# EAGLE board 1untitled (EAGLE 5.08)
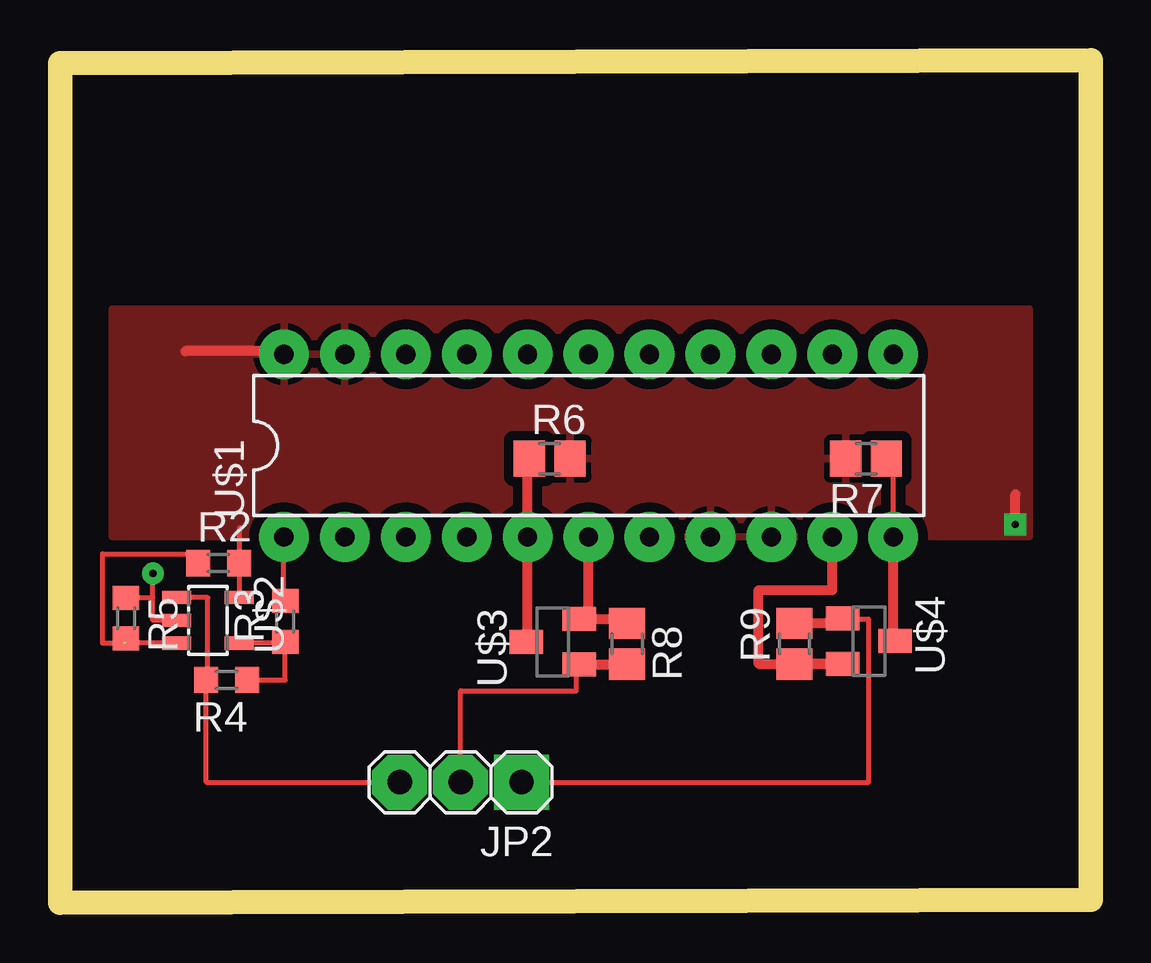
[diagram p0: board, top side]
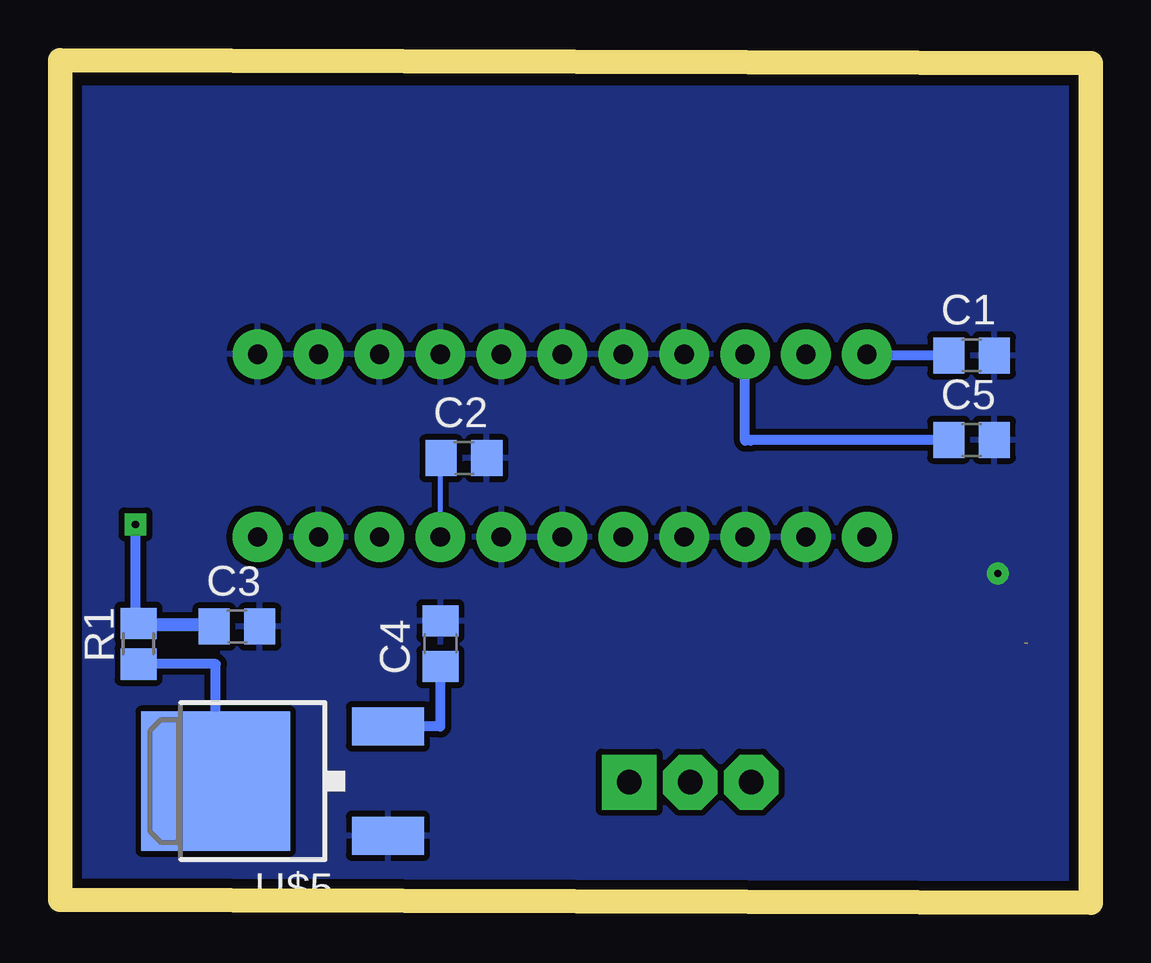
[diagram p1: board, bottom side, seen from below]

Size 42.97 x 35.13 mm. Coordinates in mm from the lower left corner, seen from the top.
Outline: 0,0 42.97,0.13 42.97,35.13 0,35 0,0
Copper layers (1*16): Top 0.015mm / dielectric 1.5mm / Bottom 0.015mm
Design rules "default *": minimum track width 0.2mm, minimum drill 0.3mm, track to track 0.25mm, track to pad 0.25mm, pad to pad 0.25mm, via to via 0.25mm, smd to smd 0.25mm, copper to edge 0.4mm, drill to drill 0.4mm, minimum pad ring 25mil, minimum via ring 12mil, stop-mask expansion 4mil, vias tented up to drill 0mil, thermal gap 10mil
bRestrict: area 45.5,10.6 to 50.9,22.5

## Footprints (pad centres in the part's own frame; a part is rotated, then mirrored left to right if it is on the bottom)
C0805 = smd 1.3 x 1.5: 1 -0.95,0; 2 0.95,0
1X03-S = drill 1.016 square: 1 -2.54,0 | drill 1.016 octagon: 2 0,0; 3 2.54,0
R0805 = smd 1.3 x 1.5: 1 -0.85,0; 2 0.85,0
R0603 = smd 1 x 1.1: 1 -0.85,0; 2 0.85,0
DIL22 = drill 0.8 round: P$1 0,0; P$2 2.54,0; P$3 5.08,0; P$4 7.62,0; P$5 10.16,0; P$6 12.7,0; P$7 15.24,0; P$8 17.78,0; P$9 20.32,0; P$10 22.86,0; P$11 25.4,0; P$12 25.4,7.62; P$13 22.86,7.62; P$14 20.32,7.62; P$15 17.78,7.62; P$16 15.24,7.62; P$17 12.7,7.62; P$18 10.16,7.62; P$19 7.62,7.62; P$20 5.08,7.62; P$21 2.54,7.62; P$22 0,7.62
SOT23-5L = smd 0.55 x 1.2: 1 -0.95,-1.3; 2 0,-1.3; 3 0.95,-1.3; 4 0.95,1.3; 5 -0.95,1.3
SOT23 = smd 1 x 1.4: 1 -0.95,-1.1; 2 0.95,-1.1; 3 0,1.1
DPACK = smd 1.6 x 3: 1 -2.28,-4.8; 3 2.28,-4.8 | smd 5.8 x 6.2: 2 0,2.38

## Placement (x,y rotation side)
C1  10u  [C0805]  4.98,22.81 0 bottom
C2  10u  [C0805]  26.13,18.53 0 bottom
C3  10u  [C0805]  35.59,11.51 0 bottom
C4  [C0805]  27.11,10.79 90 bottom
C5  [C0805]  4.98,19.28 0 bottom
JP2  [1X03-S]  16.7,5.02 180 top
R1  1  [R0805]  39.7,10.79 90 bottom
R2  1k  [R0603]  6.61,14.15 0 top
R3  1k  [R0603]  9.39,11.72 90 top
R4  1k  [R0603]  6.95,9.28 180 top
R5  1k  [R0603]  2.75,11.86 270 top
R6  200  [R0805]  20.41,18.51 0 top
R7  200  [R0805]  33.6,18.51 180 top
R8  10k  [R0805]  23.64,10.79 270 top
R9  10k  [R0805]  30.61,10.79 90 top
U$1  ILX55  [DIL22]  9.33,15.24 0 top
U$2  TSV911  [SOT23-5L]  6.17,11.77 270 top
U$3  2N7002  [SOT23]  20.54,10.87 90 top
U$4  2N7002  [SOT23]  33.72,10.9 270 top
U$5  AMS1117A  [DPACK]  34.1,5.06 90 bottom

## Library data of the parts
C1-C5 = rcl
JP2 = pinhead-2
R1-R9 = resistor
U$1 = sensor
U$2 = OU
U$3 U$4 = transistor
U$5 = stabil

## Nets
CCD_VDD5: C1.1 C2.1 C3.1 R1.2 R2.2 R6.2 R7.2 U$1.P$8 U$1.P$9 U$1.P$21 U$1.P$22 U$2.5
GND: C1.2 C2.2 C3.2 C4.2 C5.2 R5.1 R8.1 R9.1 U$1.P$2 U$1.P$3 U$1.P$4 U$1.P$6 U$1.P$7 U$1.P$10 U$1.P$12 U$1.P$13 U$1.P$14 U$1.P$15 U$1.P$16 U$1.P$17 U$1.P$18 U$1.P$19 U$2.2 U$3.2 U$4.2 U$5.1
N$1: C4.1 U$5.3
N$2: R1.1 U$5.2
N$3: R3.2 U$1.P$1
N$4: R3.1 R4.1 U$2.4
N$5: JP2.3 R4.2 U$2.1
N$6: R6.1 U$1.P$5 U$3.3
N$7: R7.1 U$1.P$11 U$4.3
N$8: C5.1 U$1.P$20
N$9: R2.1 R5.2 U$2.3
N$10: JP2.2 R8.2 U$3.1
N$11: JP2.1 R9.2 U$4.1

## Tracks (layer width: path | path; a pad name or v marks a point on that pad's centre or on a via)
CCD_VDD5  (via drill 0.3)
  Top 0.2: R2.2 7.62,14.15 | U$2.5 7.46,12.71 R2.2 | R2.2 7.49,14.15 7.49,15.62
  Top 0.406: 5.22,22.99 9.34,22.99 U$1.P$22 | v39.83,15.77 39.83,17.01
  Bottom 0.2: 27.11,16.04 27.11,18.53 C2.1
  Bottom 0.406: U$1.P$8 27.11,16.04 | C1.1 9.34,22.81 U$1.P$22 | R1.2 36.54,11.64 C3.1 39.83,11.51 v39.83,15.77
  pour Top (isolate 0.406): 2.17,24.73 40.4,24.73 40.4,15.27 2.17,15.27
GND  (via drill 0.3)
  Top 0.2: R5.1 3.87,12.71 3.87,11.81 4.87,11.81 U$2.2 3.87,11.77 v3.87,13.72
  Top 0.406: R8.1 23.64,11.82 U$3.2 21.64,11.89 22.04,11.89 U$1.P$6 | R9.1 30.61,9.95 U$4.2 29.12,9.95 29.12,13.03 32.19,13.03 U$1.P$10
  Bottom 0.2: v3.87,13.72 3.87,13.97
  pour Bottom (isolate 0.254): 0.32,0.98 41.98,0.98 41.98,33.98 0.32,33.98
N$1
  Bottom 0.406: U$5.3 27.11,7.34 C4.1
N$2
  Bottom 0.406: R1.1 36.48,9.94 U$5.2
N$3
  Top 0.2: 9.33,15.27 9.33,12.57 R3.2
  Top 0.406: U$1.P$1 9.34,15.27 9.33,15.27
N$4
  Top 0.2: U$2.4 9.39,10.81 R3.1 9.39,9.28 R4.1
N$5
  Top 0.2: U$2.1 6.16,12.71 6.16,9.28 R4.2 6.1,5.02 JP2.3
N$6
  Top 0.406: R6.1 19.49,18.51 U$1.P$5 19.49,10.87 U$3.3
N$7
  Top 0.2: U$1.P$11 34.73,18.51 R7.1
  Top 0.406: U$4.3 34.73,10.9 U$1.P$11
N$8
  Bottom 0.406: C5.1 14.19,19.28 14.19,19.25 14.41,19.25 U$1.P$20
N$9  (1 unrouted)
  Top 0.2: U$2.3 2.63,10.81 | R2.1 5.76,14.54 1.78,14.54 1.78,10.81 2.75,10.81 R5.2
N$10
  Top 0.2: 21.53,9.92 21.53,8.83 16.7,8.83 JP2.2
  Top 0.406: U$3.1 21.64,10.19 | U$3.1 23.64,9.92 R8.2 | 21.53,9.92 U$3.1
N$11
  Top 0.2: JP2.1 33.72,5.02 33.72,11.81 32.62,11.81
  Top 0.406: R9.2 32.62,11.64 U$4.1 32.62,11.81